# Altium PCB MiniBall.PcbDoc
Units mm, origin at the board's own origin, x right, y up, seen from the top; angles counter-clockwise.
Board outline 43 x 55 mm, 4 copper layers (Top Layer, Plane 1, Plane 2, Bottom Layer), stack 0.781 mm thick; 44 components, 24 nets, 153 pads, 113 vias.
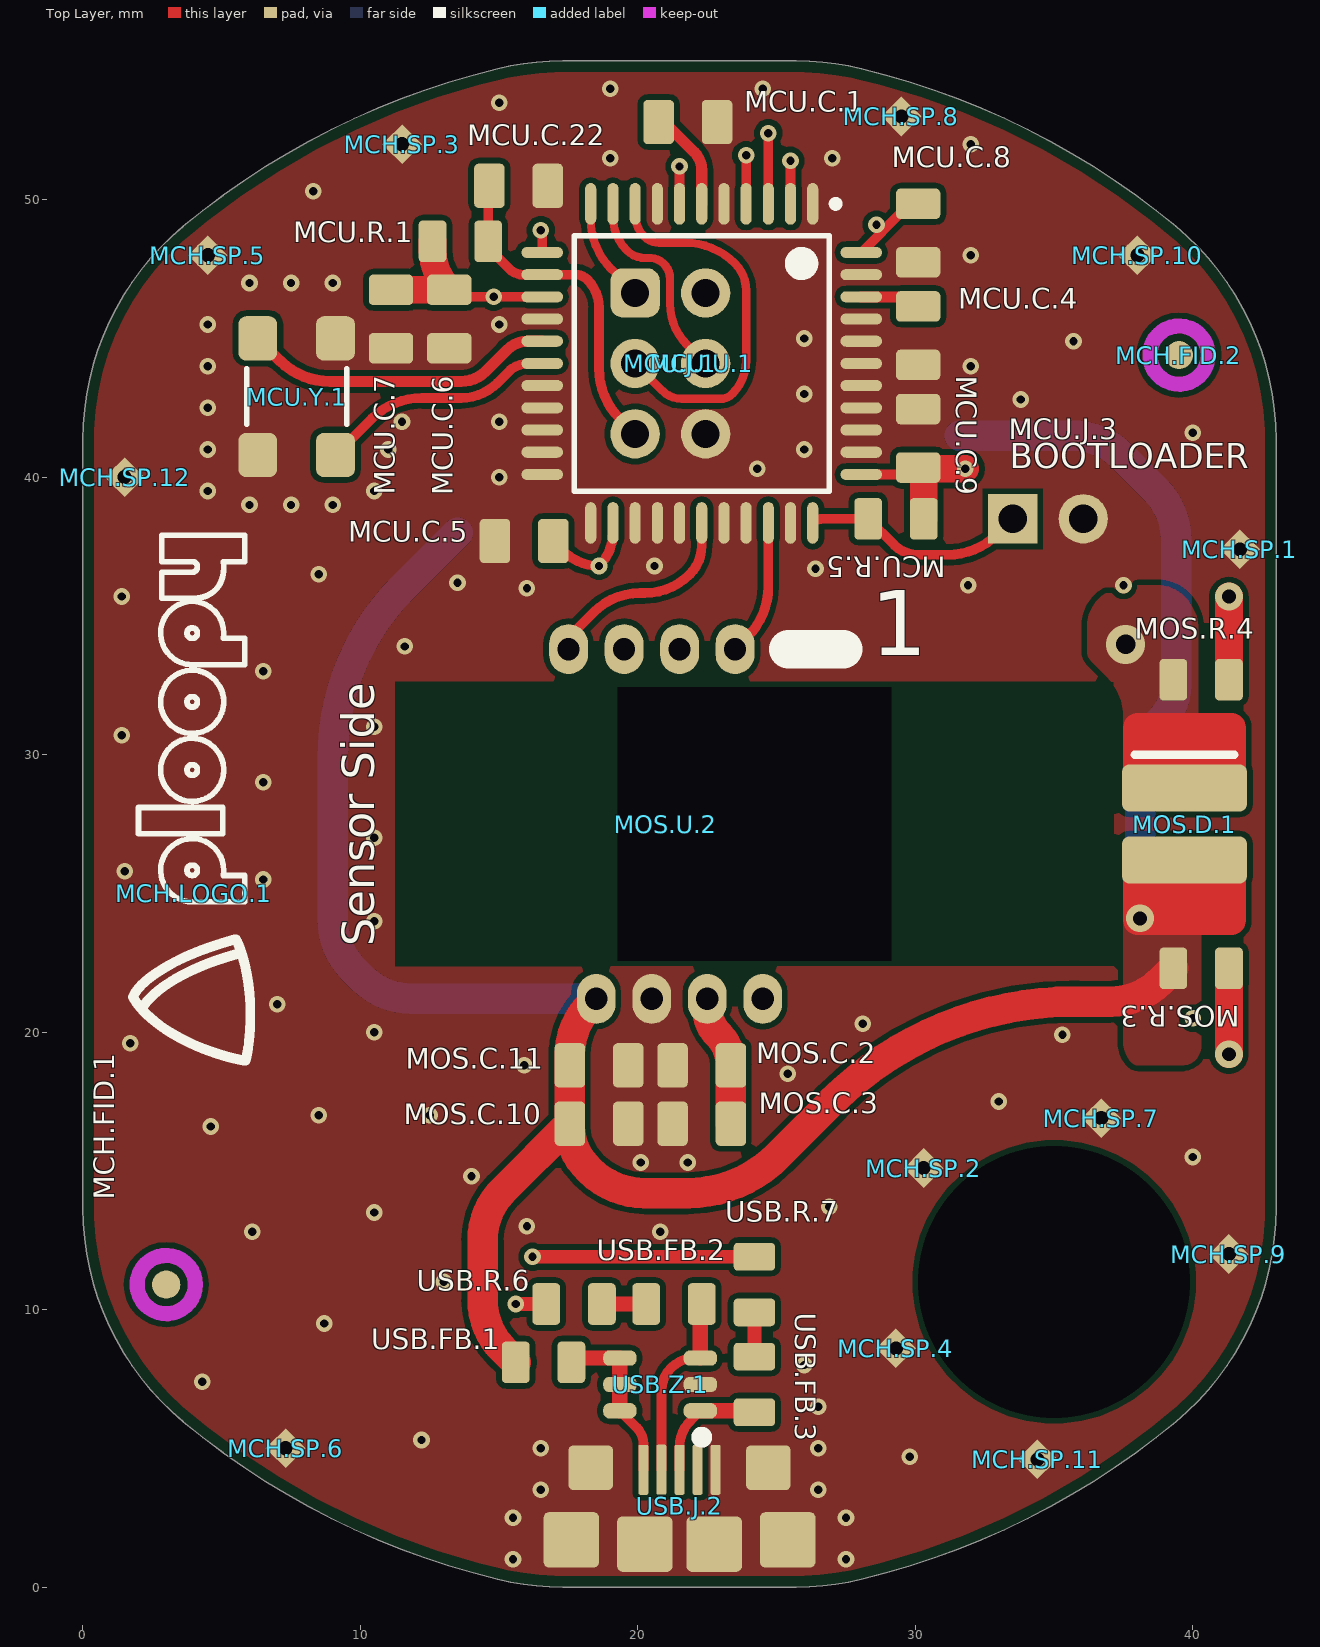
[diagram p0: Top Layer view]
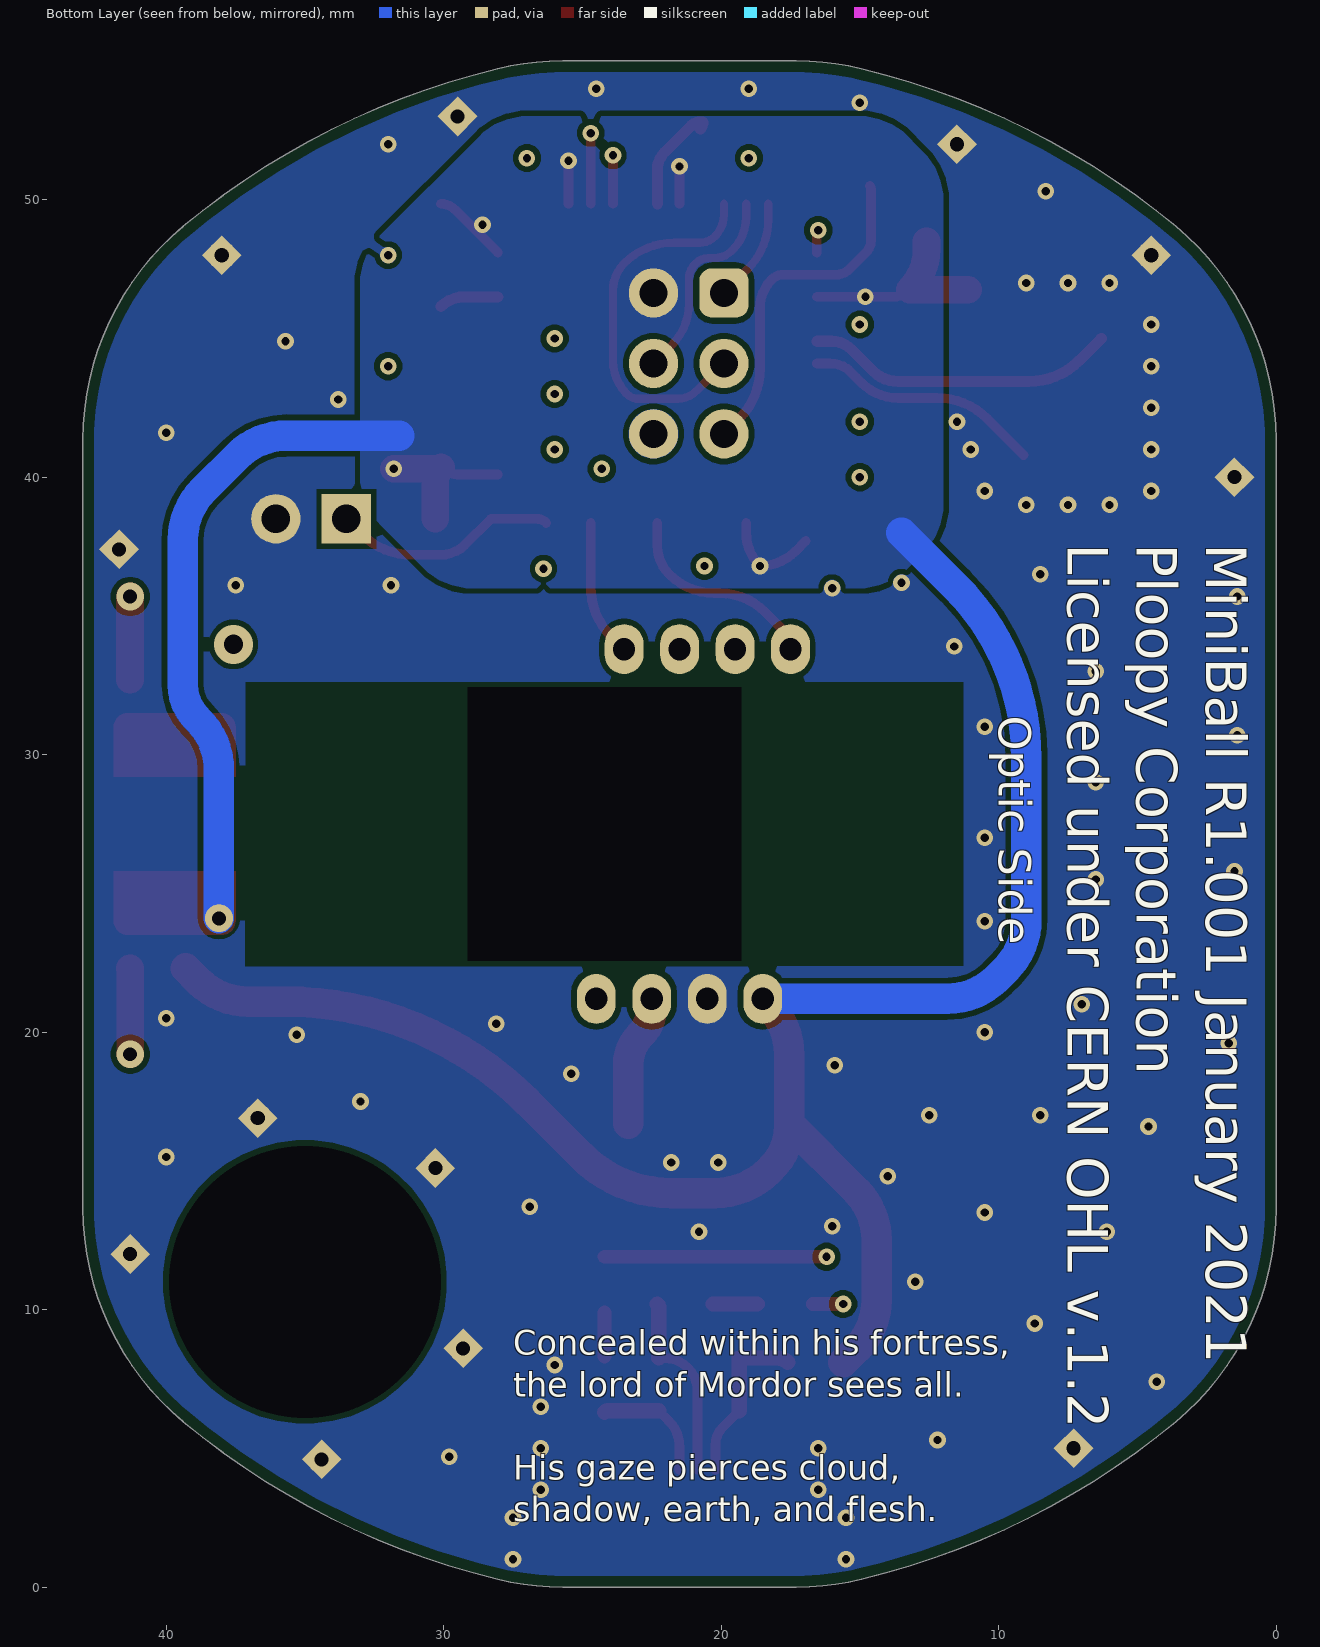
[diagram p1: Bottom Layer view, seen from below]
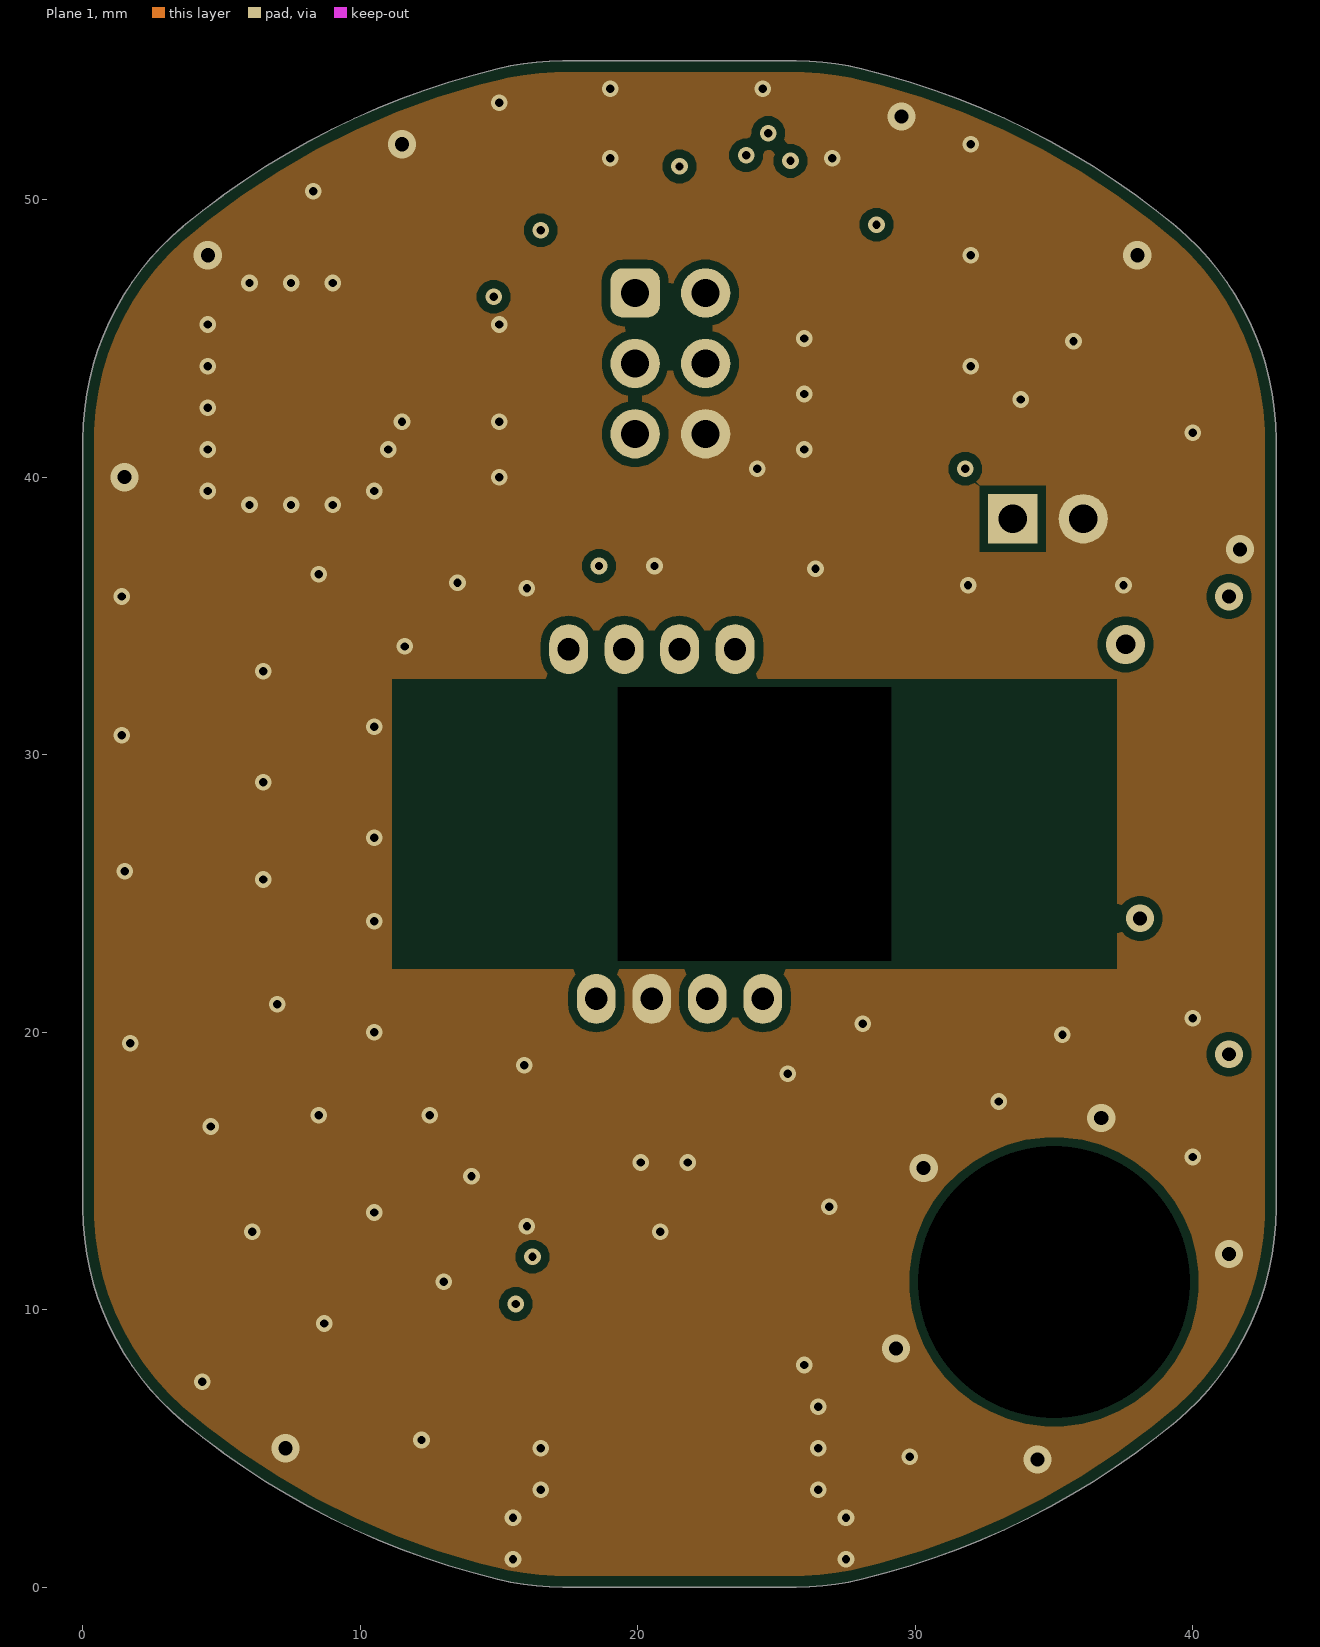
[diagram p2: Plane 1]
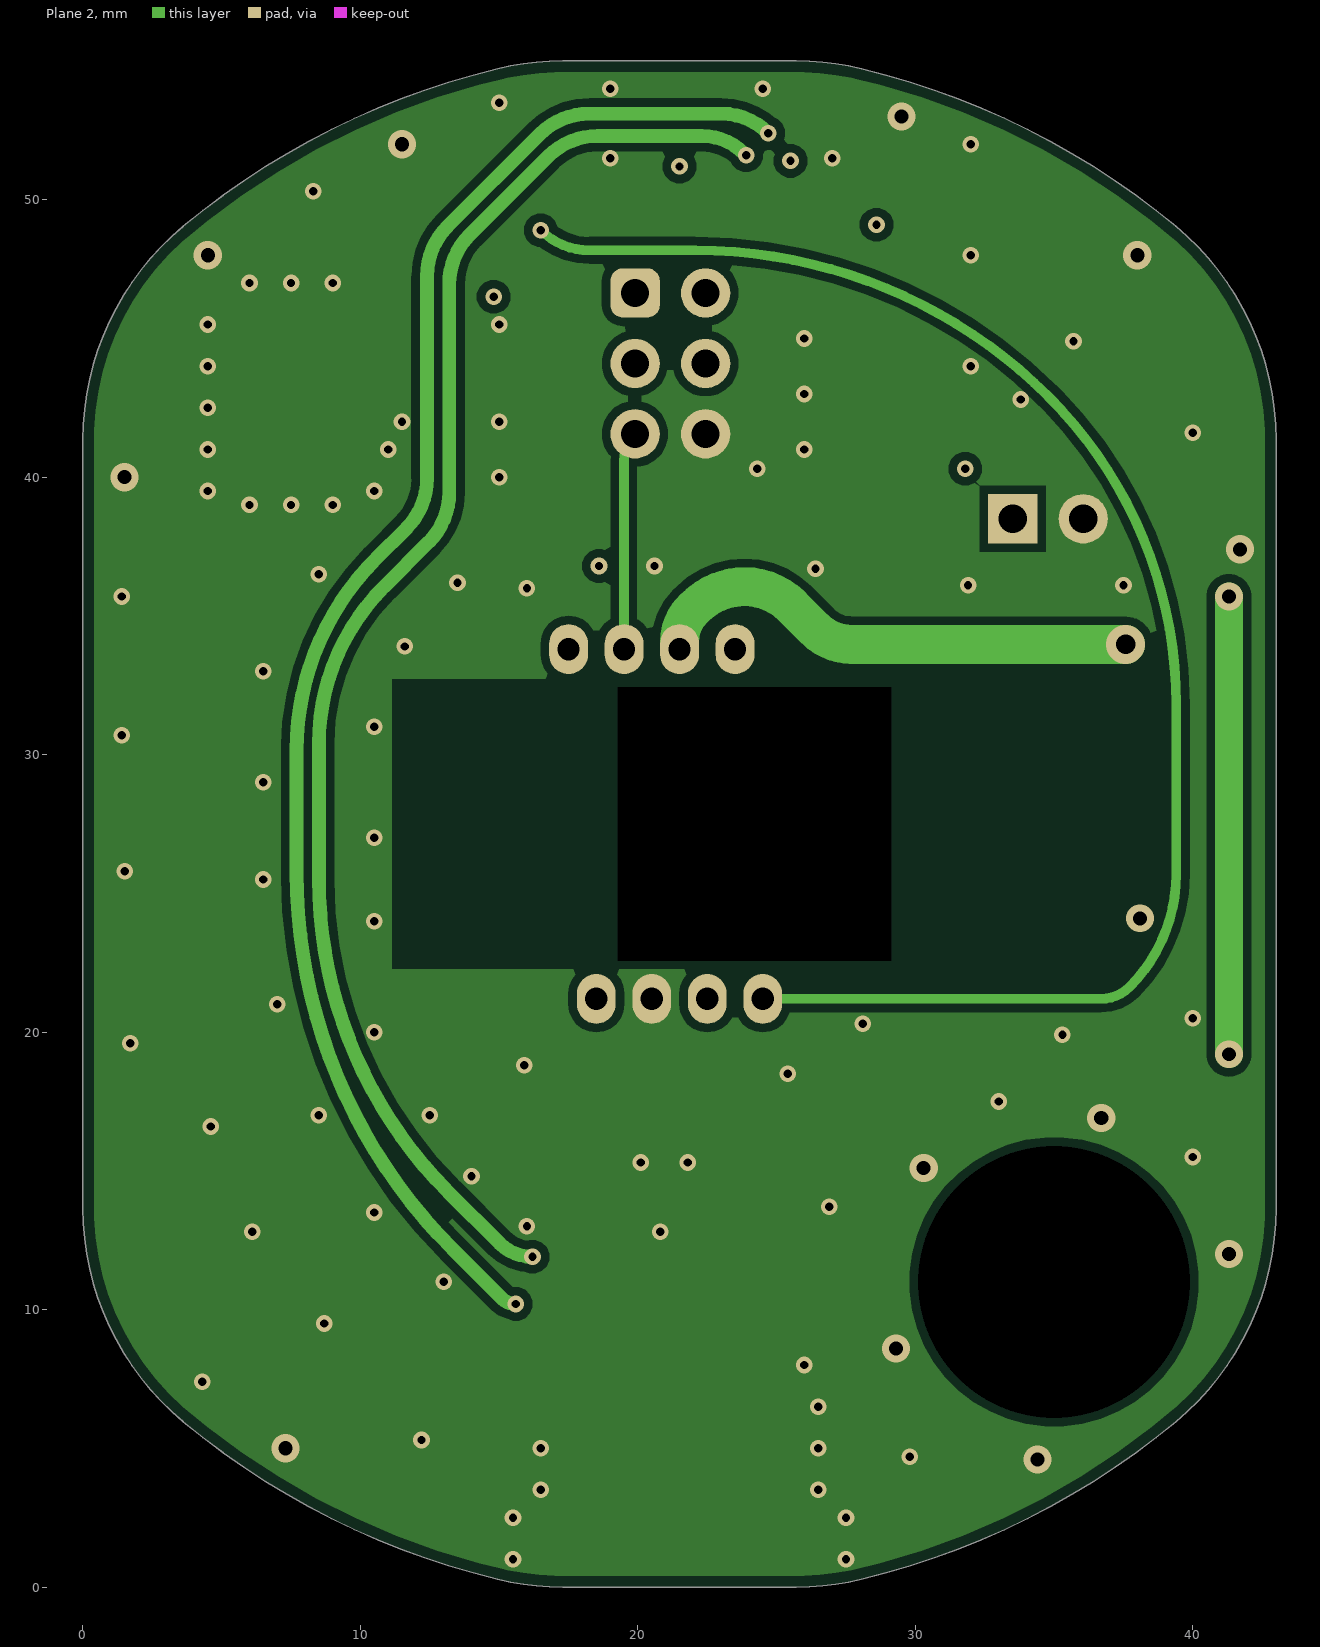
[diagram p3: Plane 2]

## Layer stack, top to bottom
Top Mask: solder mask 0.01, Solder Resist, Dk 3.5
Top Layer: signal copper 0.036
Dielectric 1: prepreg 0.127, FR-4, Dk 4.2
Plane 1: signal copper 0.036
Dielectric 4: core 0.383, Dk 4.2
Plane 2: signal copper 0.036
Dielectric 2: prepreg 0.127, Dk 4.2
Bottom Layer: signal copper 0.036
Bottom Solder: solder mask 0.01, Solder Resist, Dk 3.5

## Board outline
3.611,5.96 ccw(c21.5,27.5) 14.946,0.278 ccw(c17.287,10) 17.287,0 25.713,0 ccw(c25.713,10) 28.054,0.278 ccw(c21.5,27.5) 39.389,5.96 ccw(c33,13.653) 43,13.653 43,41.347 ccw(c33,41.347) 39.389,49.04 ccw(c21.5,27.5) 28.054,54.722 ccw(c25.713,45) 25.713,55 17.287,55 ccw(c17.287,45) 14.946,54.722 ccw(c21.5,27.5) 3.611,49.04 ccw(c10,41.347) 0,41.347 0,13.653 ccw(c10,13.653)

## Design rules (kind name [scope] priority, off if disabled: settings)
BoardOutlineClearance [(Not HasFootprint('SPARKGAP'))] p1: gap=0.4 ignorepadtopadclearanceinfootprint=FALSE except(0: Arc-SplitBarrior Arc-SplitContinuation Track-SplitBarrior Track-SplitContinuation SMDPad-SplitBarrior SMDPad-SplitContinuation THPad-SplitBarrior THPad-SplitContinuation Via-SplitBarrior Via-SplitContinuation Fill-SplitBarrior Fill-SplitContinuation Poly-SplitBarrior Poly-SplitContinuation Region-SplitBarrior Region-SplitContinuation Text-SplitBarrior Text-SplitContinuation)
Clearance "HighV Pads" [(InNetClass('HighV') AND (IsPad OR IsVia)) vs IsPad OR IsVia] p1: gap=0.4 ignorepadtopadclearanceinfootprint=FALSE except(0: Arc-Hole Track-Hole SMDPad-Hole THPad-Hole Via-Hole Fill-Hole Poly-Hole Region-Hole Text-Hole) // Establishes minimum clearance between bare pads that are high voltage, per IPC2221A Table 6-1, 51-100V, condition A6
Clearance Inter-Pad [IsPad vs IsPad] p2: gap=0.2 ignorepadtopadclearanceinfootprint=FALSE except(0: Arc-Hole Track-Hole SMDPad-Hole THPad-Hole Via-Hole Fill-Hole Poly-Hole Region-Hole Text-Hole)
Clearance "Spark Gaps" [InNetClass('Spark Gap') vs InNet('GND') And InPoly] p3: gap=0.635 ignorepadtopadclearanceinfootprint=FALSE except(0: Arc-Hole Track-Hole SMDPad-Hole THPad-Hole Via-Hole Fill-Hole Poly-Hole Region-Hole Text-Hole)
Clearance FIDs [Name like 'FID*'] p4: gap=1.016 ignorepadtopadclearanceinfootprint=FALSE except(0: Arc-Hole Track-Hole SMDPad-Hole THPad-Hole Via-Hole Fill-Hole Poly-Hole Region-Hole Text-Hole)
Clearance "Inner Planes" [InPoly AND OnMid] p5: gap=0.3 ignorepadtopadclearanceinfootprint=FALSE except(0: Arc-Hole Track-Hole SMDPad-Hole THPad-Hole Via-Hole Fill-Hole Poly-Hole Region-Hole Text-Hole) // Defines a larger clearance for planes on inner layers.
Clearance "All Planes" [InPoly] p6: gap=0.2 ignorepadtopadclearanceinfootprint=FALSE except(0: Arc-Hole Track-Hole SMDPad-Hole THPad-Hole Via-Hole Fill-Hole Poly-Hole Region-Hole Text-Hole) // Defines minimum clearance between planes on the same layer.
Clearance "Inner Layer Clearance" [OnMid vs OnMid] p7: gap=0.22 ignorepadtopadclearanceinfootprint=FALSE // We will give inner layers more spacing because they tend to be subject to stricter process limits.
Clearance [All] p8: gap=0.22 ignorepadtopadclearanceinfootprint=FALSE except(0: Arc-Hole Track-Hole SMDPad-Hole THPad-Hole Via-Hole Fill-Hole Poly-Hole Region-Hole Text-Hole) // 2 oz (70um) boards require at least 10mil spacing. We give a bit more to make sure things work well.
ComponentClearance "Terminal Block" [(HasFootprint('Phoenix 1933189 - Header')) vs (HasFootprint('Phoenix 1933189 - Header'))] p1: gap=-2.286 collisioncheckmode=3 verticalgap=0.254 showdistances=FALSE
ComponentClearance "FET/TP self Clearance" [(Name like 'Q*') Or (Name like 'TP*') vs (Name like 'Q*') Or (Name like 'TP*')] p2: gap=0.254 collisioncheckmode=3 verticalgap=0.254 showdistances=FALSE
ComponentClearance [Not ((Name like 'H*') Or (Name like 'FID*') Or (Name like 'SP*')) vs Not ((Name like 'H*') Or (Name like 'FID*') Or (Name like 'SP*'))] p3: gap=0.5 collisioncheckmode=3 verticalgap=0.5 showdistances=FALSE
DiffPairsRouting [All] p1: maxlimit=0.508 minlimit=0.279 mostfreqgap=0.381 substack1={769A8C6D-1C2C-4ABD-9F78-73D1337B8DA3} toplayer_{769a8c6d-1c2c-4abd-9f78-73d1337b8da3}_minwidth=0.381 toplayer_{769a8c6d-1c2c-4abd-9f78-73d1337b8da3}_maxwidth=0.381 toplayer_{769a8c6d-1c2c-4abd-9f78-73d1337b8da3}_prefwidth=0.381 midlayer2_{769a8c6d-1c2c-4abd-9f78-73d1337b8da3}_minwidth=0.381 midlayer2_{769a8c6d-1c2c-4abd-9f78-73d1337b8da3}_maxwidth=0.381 midlayer2_{769a8c6d-1c2c-4abd-9f78-73d1337b8da3}_prefwidth=0.381 midlayer3_{769a8c6d-1c2c-4abd-9f78-73d1337b8da3}_minwidth=0.381 midlayer3_{769a8c6d-1c2c-4abd-9f78-73d1337b8da3}_maxwidth=0.381 midlayer3_{769a8c6d-1c2c-4abd-9f78-73d1337b8da3}_prefwidth=0.381 bottomlayer_{769a8c6d-1c2c-4abd-9f78-73d1337b8da3}_minwidth=0.381 bottomlayer_{769a8c6d-1c2c-4abd-9f78-73d1337b8da3}_maxwidth=0.381 bottomlayer_{769a8c6d-1c2c-4abd-9f78-73d1337b8da3}_prefwidth=0.381 toplayer_prefgap=0.279 toplayer_minwidth=0.279 toplayer_maxwidth=0.508 toplayer_prefwidth=0.381 midlayer2_mingap=0.305 midlayer2_minwidth=0.305 midlayer2_maxwidth=0.508 midlayer2_prefwidth=0.381 midlayer3_prefgap=0.279 midlayer3_minwidth=0.279 midlayer3_maxwidth=0.508 midlayer3_prefwidth=0.381 bottomlayer_prefgap=0.279 bottomlayer_minwidth=0.279 bottomlayer_maxwidth=0.508 bottomlayer_prefwidth=0.381 maxuncoupledlength=12.7
Height [All] p1: minheight=0 maxheight=41 prefheight=12.7
HoleSize [All] p1: absolutevalues=TRUE maxlimit=100 minlimit=0.3 maxpercent=80.000 minpercent=20.000
HoleToHoleClearance [All] p1: gap=0.6 allowstackedmicrovias=TRUE
LayerPairs [All] p1: enforce=FALSE
MinimumSolderMaskSliver [All] p1: minsoldermaskwidth=0.09
NetAntennae [Not (HasFootprint('BALANCE_RESISTOR'))] p1: netantennaetolerance=0
PasteMaskExpansion [All] p1: expansion=-0.025
PlaneClearance [All] p1: clearance=0.3
PlaneConnect [All] p1: pad.planeconnectstyle=Relief pad.reliefexpansion=0.5 pad.reliefentries=4 pad.reliefconductorwidth=0.5 pad.reliefairgap=0.25 via.planeconnectstyle=Direct via.reliefexpansion=0.5 via.reliefentries=4 via.reliefconductorwidth=0.5 via.reliefairgap=0.25
PolygonConnect "PolygonConnect Spark Gap" [HasFootprint('SparkGap')] p1: connectstyle=Direct reliefconductorwidth=0.254 reliefentries=4 polygonreliefangle="90 Angle" airgapwidth=0.254 // This rule makes it so spark gaps get direct connections to ground planes.
PolygonConnect PolygonConnect_GND [All vs InNet('GND')] p2: connectstyle=Direct reliefconductorwidth=0.5 reliefentries=4 polygonreliefangle="90 Angle" airgapwidth=0.25 // This rule specifies all vias and holes connected to a GND plane have direct connections.
PolygonConnect [All] p3: connectstyle=Direct reliefconductorwidth=0.5 reliefentries=4 polygonreliefangle="90 Angle" airgapwidth=0.25
RoutingVias [All] p1: holewidth=0.5 width=1 viastyle="Through Hole" minholewidth=0.2 minwidth=0.5 maxholewidth=5.08 maxwidth=6.35
ShortCircuit [Not (InPadClass('TraceResistorPads')) vs Not (InPadClass('TraceResistorPads'))] p1: allowed=FALSE
SilkToBoardRegionClearance [All] p1 off:
SilkToSilkClearance [All] p1 off: silktosilkclearance=0.254
SilkToSolderMaskClearance SilkscreenOverComponentPads [IsPad] p1: minsilkscreentomaskgap=0.102 clearancetoexposedcopper=FALSE
SolderMaskExpansion [All] p1: expansion=0.076 istentingtop=FALSE
Width [All] p1: maxlimit=50.8 minlimit=0.26 preferedwidth=0.4 substack1={769A8C6D-1C2C-4ABD-9F78-73D1337B8DA3} midlayer2_minwidth=0.35 midlayer3_minwidth=0.35 minimp=50.000000 maximp=50.000000 favimp=50.000000
15 further rules are at their usual default settings.

## Classes and differential pairs
component class USB: USB.FB.1 USB.FB.2 USB.FB.3 USB.J.2 USB.R.6 USB.R.7 USB.Z.1
component class MOS: MOS.C.2 MOS.C.3 MOS.C.10 MOS.C.11 MOS.D.1 MOS.R.3 MOS.R.4 MOS.U.2
component class MCU: MCU.C.1 MCU.C.4 MCU.C.5 MCU.C.6 MCU.C.7 MCU.C.8 MCU.C.9 MCU.C.22 MCU.J.1 MCU.J.3 MCU.R.1 MCU.R.5 MCU.U.1 MCU.Y.1
component class MCH: MCH.FID.1 MCH.FID.2 MCH.LOGO.1 MCH.SP.1 MCH.SP.2 MCH.SP.3 MCH.SP.4 MCH.SP.5 MCH.SP.6 MCH.SP.7 MCH.SP.8 MCH.SP.9 MCH.SP.10 MCH.SP.11 MCH.SP.12

## Components (designator, comment, footprint, x,y, rotation, side; value= is the part's Value field where it differs from the comment)
MCH.FID.1 "IPC-7351 Fiducial 1mm" FIDUCIAL_1.5 3,10.9 r90 top (schematic designator FID1)
MCH.FID.2 "IPC-7351 Fiducial 1mm" FIDUCIAL_1.5 39.5,44.4 r90 top (schematic designator FID2)
MCH.LOGO.1 "Ploopy logo, silkscreen" PloopyLogo 4,25 r90 top (schematic designator LOGO1)
MCH.SP.1 "Spark Gap" SparkGap 41.7,37.4 r90 top (schematic designator SP1)
MCH.SP.2 "Spark Gap" SparkGap 30.3,15.1 r90 top (schematic designator SP2)
MCH.SP.3 "Spark Gap" SparkGap 11.5,52 r90 top (schematic designator SP3)
MCH.SP.4 "Spark Gap" SparkGap 29.3,8.6 r90 top (schematic designator SP4)
MCH.SP.5 "Spark Gap" SparkGap 4.5,48 r90 top (schematic designator SP5)
MCH.SP.6 "Spark Gap" SparkGap 7.3,5 r90 top (schematic designator SP6)
MCH.SP.7 "Spark Gap" SparkGap 36.7,16.9 r90 top (schematic designator SP7)
MCH.SP.8 "Spark Gap" SparkGap 29.5,53 r90 top (schematic designator SP8)
MCH.SP.9 "Spark Gap" SparkGap 41.3,12 r90 top (schematic designator SP9)
MCH.SP.10 "Spark Gap" SparkGap 38,48 r90 top (schematic designator SP10)
MCH.SP.11 "Spark Gap" SparkGap 34.4,4.6 r90 top (schematic designator SP11)
MCH.SP.12 "Spark Gap" SparkGap 1.5,40 r90 top (schematic designator SP12)
MCU.C.1 "0805" "0805 - TALL" 21.8,52.8 r270 top value="1uF 25V" (schematic designator C1)
MCU.C.4 "0805" "0805 - TALL" 30.1,45.1 r180 top value="0.1uF 100V" (schematic designator C4)
MCU.C.5 "0805" "0805 - TALL" 15.9,37.7 r90 top value="0.1uF 100V" (schematic designator C5)
MCU.C.6 "0805" "0805 - TALL" 13.2,45.7 r180 top value="0.1uF 100V" (schematic designator C6)
MCU.C.7 "0805" "0805 - TALL" 11.1,45.7 r180 top value="10uF 25V" (schematic designator C7)
MCU.C.8 "0805" "0805 - TALL" 30.1,48.8 r180 top value="0.1uF 100V" (schematic designator C8)
MCU.C.9 "0805" "0805 - TALL" 30.1,41.4 r0 top value="0.1uF 100V" (schematic designator C9)
MCU.C.22 "0805" "0805 - TALL" 15.7,50.5 r270 top value="0.1uF 100V" (schematic designator C22)
MCU.J.1 "Atmel_ICSP" 6x2 19.9,46.64 r0 top (schematic designator J1)
MCU.J.3 "HEADER2" 2x1 33.51,38.5 r90 top (schematic designator J3)
MCU.R.1 "0805" 0805 13.6,48.5 r270 top value="10k 1%" (schematic designator R1)
MCU.R.5 "0805" 0805 29.3,38.5 r90 top value="10k 1%" (schematic designator R5)
MCU.U.1 "ATMEGA32U4RC-AU" "ATmega32U4 - TQFP80P1200X1200X120-44N" 22.3,44.1 r270 top (schematic designator U1)
MCU.Y.1 "ECS-160-12-30B-AGM" LFXTAL055663BULK 7.7,42.9 r270 top (schematic designator Y1)
MOS.C.2 "0805" "0805 - TALL" 22.3,18.8 r90 top value="0.1uF 100V" (schematic designator C2)
MOS.C.3 "0805" "0805 - TALL" 22.3,16.7 r90 top value="1uF 25V" (schematic designator C3)
MOS.C.10 "0805" "0805 - TALL" 18.6,16.7 r270 top value="10uF 25V" (schematic designator C10)
MOS.C.11 "0805" "0805 - TALL" 18.6,18.8 r270 top value="0.1uF 100V" (schematic designator C11)
MOS.D.1 "SIDELED-A67F" SIDELED-A67F 39.4,27.5 r0 top (schematic designator D1)
MOS.R.3 "0805" 0805 40.3,22.3 r270 top value="22R 1%" (schematic designator R3)
MOS.R.4 "0805" 0805 40.3,32.7 r90 top value="22R 1%" (schematic designator R4)
MOS.U.2 "ADNS-5050" ADNS-5050 23.5,33.8 r0 top locked (schematic designator U2)
USB.FB.1 "ACML-0805-601-T" 0805 16.6,8.1 r270 top value="Ferrite Bead 600R" (schematic designator FB1)
USB.FB.2 "ACML-0805-601-T" 0805 21.3,10.2 r270 top value="Ferrite Bead 600R" (schematic designator FB2)
USB.FB.3 "ACML-0805-601-T" 0805 24.2,7.3 r180 top value="Ferrite Bead 600R" (schematic designator FB3)
USB.J.2 "10118192-0001LF" 10118192-0001LF 21.5,0.4 r180 top (schematic designator J2)
USB.R.6 "0805" 0805 17.7,10.2 r270 top value="22R 1%" (schematic designator R6)
USB.R.7 "0805" 0805 24.2,10.9 r180 top value="22R 1%" (schematic designator R7)
USB.Z.1 "IP4220CZ6,125" "PESD3V3S4UD - SOT95P275X110-6N" 20.8,7.3 r180 top (schematic designator Z1)

## Footprints (in the part's own frame and the unit in brackets; to place one, negate y for a bottom-side part, rotate by r counter-clockwise, add the part's x,y. Pads: shape width x height; smd on the part's side, far side on the other; paste and mask are expansions set on the pad)
2x1 [mil]
  rect 70x70 hole 40 paste-3897.64: 1(0,0)
  round 70 hole 40 paste-3897.64: 2(0,-100)
  body extent -50,-150 50,50, height 339
6x2 [mil]
  rrect50% 70x70 hole 40 paste-3897.64: 1(0,0)
  round 70 hole 40 paste-3897.64: 2(100,0) 3(0,-100) 4(100,-100) 5(0,-200) 6(100,-200)
  body extent -50,-250 150,50, height 330
0805 [mm] "Chip Capacitor, 2-Leads, Body 2.0x1.3mm, IPC Medium Density"
  rrect30% 1.5x1 smd paste-0.04: 1(0,1.002) 2(0,-1.002)
  body extent -0.72,-1.1 0.72,1.1, height 0.8
"0805 - TALL" [mm] "Same as 0805 footprint, but solder mask is adjusted to leave more paste behind for tall (>0.9mm) components like big caps, which tend to be solder-starved on the regular footprint."
  rrect30% 1.6x1.1 smd paste-0.04: 1(0,1.052) 2(0,-1.052)
  body extent -0.72,-1.1 0.72,1.1, height 0.8
10118192-0001LF [mm]
  rrect30% 0.35x1.8 smd paste-0.04 mask+0.07: 1(1.3,-3.825) 2(0.65,-3.828) 3(0,-3.825) 4(-0.65,-3.825) 5(-1.3,-3.825)
  rrect20% 2x2 smd paste-0.3: 6(-3.9,-1.3) 6(-1.25,-1.147) 6(1.25,-1.147) 6(3.9,-1.3)
  rrect20% 1.6x1.6 smd paste-0.3: 6(-3.2,-3.9) 6(3.2,-3.9)
  body extent -3.96,-4.36 3.96,1.3, height 2.79
ADNS-5050 [mm]
  oval 1.4x1.8 hole 0.8: 1(0,0) 2(-2,0) 3(-4,0) 4(-6,0) 5(-5,-12.6) 6(-3,-12.6) 7(-1,-12.6) 8(1,-12.6)
  rect 0x0 hole 9.85 square unplated: ""(0.7,-6.3)
  silkscreen extent 1.92,0 3.9,0, body extent -15,-14.3 15,1.7, height 5.45
"ATmega32U4 - TQFP80P1200X1200X120-44N" [mm] "TQFP, 44-Leads, Body 10.00x10.00mm, Pitch 0.80mm, IPC Medium Density"
  rrect100% 1.5x0.4 smd paste-0.06: 1(-5.75,4) 2(-5.75,3.2) 3(-5.75,2.4) 4(-5.75,1.6) 5(-5.75,0.8) 6(-5.75,0) 7(-5.75,-0.8) 8(-5.75,-1.6) 9(-5.75,-2.4) 10(-5.75,-3.2) 11(-5.75,-4) 23(5.75,-4) 24(5.75,-3.2) 25(5.75,-2.4) 26(5.75,-1.6) 27(5.75,-0.8) 28(5.75,0) 29(5.75,0.8) 30(5.75,1.6) 31(5.75,2.4) 32(5.75,3.2) 33(5.75,4)
  rrect100% 0.4x1.5 smd paste-0.06: 12(-4,-5.75) 13(-3.2,-5.75) 14(-2.4,-5.75) 15(-1.6,-5.75) 16(-0.8,-5.75) 17(0,-5.75) 18(0.8,-5.75) 19(1.6,-5.75) 20(2.4,-5.75) 21(3.2,-5.75) 22(4,-5.75) 34(4,5.75) 35(3.2,5.75) 36(2.4,5.75) 37(1.6,5.75) 38(0.8,5.75) 39(0,5.75) 40(-0.8,5.75) 41(-1.6,5.75) 42(-2.4,5.75) 43(-3.2,5.75) 44(-4,5.75)
  silkscreen extent -5.87,-4.6 4.6,4.95, body extent -5,-5 5,5, height 1.2
FIDUCIAL_1.5 [mil]
  round 40 smd paste-60 mask+30: 1(0,0)
  Top Layer keep-out circle w21.65: c0,0 r41.34
LFXTAL055663BULK [mm]
  rrect40% 1.6x1.4 smd paste-0.05: 1(-2.1,-1.4) 2(2.1,-1.4) 3(2.1,1.4) 4(-2.1,1.4)
  silkscreen extent -1,-1.8 1,1.8, body extent -2.5,-1.6 2.5,1.6, height 1
"PESD3V3S4UD - SOT95P275X110-6N" [mm] "SOT23, 6-Leads, Body 2.90x2.75mm, Pitch 0.95mm, IPC Medium Density"
  rrect80% 1.2x0.55 smd paste-0.045 mask+0.085: 1(-1.45,0.95) 2(-1.45,0) 3(-1.45,-0.95) 4(1.45,-0.95) 5(1.45,0) 6(1.45,0.95)
  silkscreen extent -1.63,1.78 -1.38,2.02, body extent -0.85,-1.55 0.85,1.55, height 1.1
PloopyLogo [mm]
  silkscreen extent -6.04,-2.03 12.9,2.2
SIDELED-A67F [mm]
  rrect30% 4.5x1.7 smd paste-0.04: A(0.3,-1.3) C(0.3,1.3)
  Top Layer region: 2.5,-1.7 2.5,-3.5 2.462,-3.691 2.354,-3.854 2.191,-3.962 2,-4 2,-4 -1.4,-4 -1.591,-3.962 -1.754,-3.854 -1.862,-3.691 -1.9,-3.5 -1.9,-3.5 -1.9,-1.7
  Top Layer region: -1.9,1.7 -1.9,3.5 -1.862,3.691 -1.754,3.854 -1.591,3.962 -1.4,4 -1.4,4 2,4 2.191,3.962 2.354,3.854 2.462,3.691 2.5,3.5 2.5,3.5 2.5,1.7
  silkscreen extent -1.5,2.5 2.1,2.5, body extent -1.56,-2 2.2,2, height 4.03
SparkGap [mil]
  rect 40x40 smd rot 45 paste-99 mask+4: 1(0,0)
  rect 40x40 smd far side rot 45 paste-99 mask+4: 1(0,0)

## Part data
MCH.FID.1 MCH.FID.2: library part FIDUCIAL_1.5, PNP-A=1, PNP-da=0, PNP-dx=0, PNP-dy=0, PNP-FeedType=Fiducial, PNP-Level=1, PNP-Lv=1, PNP-Nzl=2, PNP-PlacePriority=0, PNP-Pt=0, PNP-TapeIndex=0, PNP-TapeWidth=0, PNP-Thk=1.02, PNP-TS=70, PNP-Type=MARK1, PNP-Voff=0, PNP-W=0, PNP-X=4, PNP-Y=4
MCH.LOGO.1: library part PloopyLogo, PNP-A=0, PNP-da=0, PNP-dx=0, PNP-dy=0, PNP-FeedType=Tape, PNP-Level=1, PNP-Lv=1, PNP-Nzl=2, PNP-PlacePriority=1, PNP-Pt=0, PNP-TapeIndex=1, PNP-TapeWidth=8, PNP-Thk=1, PNP-TS=70, PNP-Type=CHI, PNP-Voff=0, PNP-W=0, PNP-X=1, PNP-Y=1
MCH.SP.1 MCH.SP.2 MCH.SP.3 MCH.SP.4 MCH.SP.5 MCH.SP.6 MCH.SP.7 MCH.SP.8 MCH.SP.9 MCH.SP.10 MCH.SP.11 MCH.SP.12: "Open square pad for spark gapping", PNP-A=0, PNP-da=0, PNP-dx=0, PNP-dy=0, PNP-FeedType=Tape, PNP-Level=1, PNP-Lv=1, PNP-Nzl=2, PNP-PlacePriority=1, PNP-Pt=0, PNP-TapeIndex=1, PNP-TapeWidth=8, PNP-Thk=1, PNP-TS=70, PNP-Type=CHI, PNP-Voff=0, PNP-W=0, PNP-X=1, PNP-Y=1
MCU.C.1 MOS.C.3: library part "Cap 1uF 25V", "0805, X5R or better", Supplier Part Number 1=1276-1066-2-ND, Supplier 1=Digi-Key, Supplier 2=Digi-Key, Supplier Part Number 2=1276-1066-1-ND
MCU.C.4 MCU.C.5 MCU.C.6 MCU.C.8 MCU.C.9 MCU.C.22 MOS.C.2 MOS.C.11: library part "Cap 0.1uF 100V", "0805, X5R or better", Supplier Part Number 1=1276-6840-2-ND, Supplier 1=Digi-Key
MCU.C.7 MOS.C.10: library part "Cap 10uF 25V", "0805, X5R or better", Supplier Part Number 1=81-GRM21BR61E106KA3L, Supplier 1=Mouser, Supplier 2=Digi-Key, Supplier Part Number 2=490-5523-1-ND
MCU.J.1: "6-pin 0.100\" ICSP header", Supplier Part Number 1=S2012EC-03-ND, Supplier 1=Digi-Key
MCU.J.3: "2-pin 0.100\" header", Supplier Part Number 1=855-M20-9990245, Supplier 1=Mouser, Supplier 2=Digi-Key, Supplier Part Number 2=952-2261-ND
MCU.R.1 MCU.R.5: library part "Res 10k 1% 0805", "Chip resistor", Supplier Part Number 1=RMCF0805FT10K0TR-ND, Supplier 1=Digi-Key
MCU.U.1: "IC MCU 8BIT 32KB FLASH 44TQFP", Supplier Part Number 1=ATMEGA32U4RC-AU-ND, PNP-A=270, PNP-da=0, PNP-dx=0, PNP-dy=0, PNP-FeedType=Tray, PNP-Level=1.2, PNP-Lv=126, PNP-Nzl=6, PNP-PlacePriority=3, PNP-Pt=1, PNP-Thk=1.6, PNP-TS=70, PNP-Type=QFP, PNP-Voff=0, PNP-W=0.1, PNP-X=12, PNP-Y=12, Supplier 1=Digi-Key, Supplier 2=Mouser, Supplier 3=Arrow, Supplier Part Number 2=556-ATMEGA32U4RC-AU, Supplier Part Number 3=ATMEGA32U4RC-AU
MCU.Y.1: "16MHz Crystal 12pF 100 Ohms 4-SMD, No Lead", Supplier Part Number 1=XC2686CT-ND, Supplier 1=Digi-Key, Supplier 2=Mouser, Supplier Part Number 2=520-160-12-30B-AGMT
MOS.D.1: "Red/Orange/Yellow Side-facing SMT LEDs, high brightness (~2lm)", Supplier Part Number 1=475-3392-1-ND, Supplier 1=Digi-Key, Supplier 2=Digi-Key, Supplier Part Number 2=475-3415-6-ND
MOS.R.3 MOS.R.4 USB.R.6 USB.R.7: library part "Res 22R 1% 0805", "Chip resistor", Supplier Part Number 1=RMCF0805FT22R0CT-ND, Supplier 1=Digi-Key, Supplier 2=Arrow, Supplier Part Number 2=RMCF0805FT22R0
MOS.U.2: "Optical Mouse Navigation Sensor"
USB.FB.1 USB.FB.2 USB.FB.3: "FERRITE BEAD 600 OHM 0805 1LN", Supplier Part Number 1=535-12556-1-ND, Supplier 1=Digi-Key
USB.J.2: "CONN RCPT USB2.0 MICRO B SMD R/A"
USB.Z.1: "TVS DIODE 5.5V 6TSOP (Low capacitance, USB)", Supplier Part Number 1=1727-3578-1-ND, Supplier 1=Digi-Key, Supplier 2=Mouser, Supplier 3=Arrow, Supplier Part Number 2=771-IP4220CZ6-T/R, Supplier Part Number 3=IP4220CZ6,125

## Free pads (board coordinates)
  round 0 hole 9.8: ""(35,11)

## Via types
v1: diameter 0.6, hole 0.3, Top Layer to Bottom Layer, tented both sides, 97 vias
v2: diameter 1.016, hole 0.508, Top Layer to Bottom Layer, tented both sides, 12 vias
v3: diameter 1, hole 0.5, Top Layer to Bottom Layer, tented both sides, 3 vias
v4: diameter 1.4, hole 0.7, Top Layer to Bottom Layer, tented both sides, 1 vias

## Nets (pads, with @x,y where several pads share a name; then routed paths per layer and width w, separated by ;. In a path a pad name is that pad's centre, name@x,y a point inside that pad or via, vN(x,y) a via of type N, cw(c..) or ccw(c..) an arc to the next point about the centre after c; other vN are vias at no path point)
GND: MCH.SP.1.1 MCH.SP.2.1 MCH.SP.3.1 MCH.SP.4.1 MCH.SP.5.1 MCH.SP.6.1 MCH.SP.7.1 MCH.SP.8.1 MCH.SP.9.1 MCH.SP.10.1 MCH.SP.11.1 MCH.SP.12.1 MCU.C.1.1 MCU.C.4.1 MCU.C.5.1 MCU.C.6.1 MCU.C.7.1 MCU.C.8.1 MCU.C.9.1 MCU.C.22.1 MCU.J.1.6 MCU.J.3.2 MCU.U.1.1 MCU.U.1.5 MCU.U.1.8 MCU.U.1.15 MCU.U.1.18 MCU.U.1.19 MCU.U.1.20 MCU.U.1.21 MCU.U.1.22 MCU.U.1.23 MCU.U.1.25 MCU.U.1.26 MCU.U.1.27 MCU.U.1.29 MCU.U.1.30 MCU.U.1.32 MCU.U.1.35 MCU.U.1.36 MCU.U.1.37 MCU.U.1.38 MCU.U.1.39 MCU.U.1.40 MCU.U.1.41 MCU.U.1.43 MCU.Y.1.2 MCU.Y.1.4 MOS.C.2.1 MOS.C.3.1 MOS.C.10.1 MOS.C.11.1 MOS.U.2.6 USB.J.2.5 USB.J.2.6 USB.Z.1.2
  other v1: 15.5,1 27.5,1 15.5,2.5 27.5,2.5 16.5,3.5 26.5,3.5 29.8,4.7 16.5,5 26.5,5 12.2,5.3 26.5,6.5 4.3,7.4 26,8 8.7,9.5 13,11 6.1,12.8 20.8,12.8 16,13 10.5,13.5 26.9,13.7 14,14.8 20.1,15.3 21.8,15.3 40,15.5 4.6,16.6 8.5,17 12.5,17 33,17.5 25.4,18.5 15.9,18.8 1.7,19.6 35.3,19.9 10.5,20 28.1,20.3 40,20.5 7,21 10.5,24 6.5,25.5 1.5,25.8 10.5,27 6.5,29 1.4,30.7 10.5,31 6.5,33 11.6,33.9 1.4,35.7 16,36 31.9,36.1 37.5,36.1 13.5,36.2 8.5,36.5 26.4,36.7 20.6,36.8 6,39 7.5,39 9,39 4.5,39.5 10.5,39.5 15,40 24.3,40.3 4.5,41 11,41 26,41 40,41.6 11.5,42 15,42 4.5,42.5 33.8,42.8 26,43 4.5,44 32,44 35.7,44.9 26,45 4.5,45.5 15,45.5 6,47 7.5,47 9,47 32,48 8.3,50.3 19,51.5 27,51.5 32,52 15,53.5 19,54 24.5,54
  other v2: 34.4,4.6 7.3,5 29.3,8.6 41.3,12 30.3,15.1 36.7,16.9 41.7,37.4 1.5,40 4.5,48 38,48 11.5,52 29.5,53
MISO: MCU.J.1.1 MCU.U.1.11 | length 3.8
  Top Layer w0.3: MCU.U.1.11 18.3,49.292 ccw(c20.84,49.292) 19.044,47.496 MCU.J.1.1
MOSI: MCU.J.1.4 MCU.U.1.10 | length 7.4
  Top Layer w0.3: MCU.U.1.10 19.1,49.382 ccw(c20.807,49.382) 19.6,48.175 ccw(c20.264,48.839) 20.264,47.9 20.464,47.9 20.48,47.9 cw(c20.407,47.152) 21.159,47.152 21.159,46.25 ccw(c23.257,46.25) 21.773,44.767 MCU.J.1.4
NetMCU.C.1_2: MCU.C.1.2 MCU.U.1.6 | length 3.9
  Top Layer w0.4: MCU.C.1.2@20.648,52.8 ccw(c21.004,52.8) MCU.C.1.2@20.752,52.548 ; MCU.C.1.2 cw(c20.748,52.311) 21.093,52.657 22.025,51.725 cw(c21.361,51.061) 22.3,51.061 MCU.U.1.6
NetMCU.C.4_2: MCU.C.4.2 MCU.U.1.42 | length 2.1
  Top Layer w0.4: MCU.U.1.42 29.261,46.5 cw(c29.261,45.313) MCU.C.4.2
NetMCU.J.3_1: MCU.J.3.1 MCU.R.5.1 MCU.U.1.33 | length 8.2
  Top Layer w0.35: MCU.U.1.33 cw(c26.662,37.988) 26.662,38.5 MCU.R.5.1 29.242,37.555 ccw(c30.1,38.413) 30.1,37.2 31.158,37.2 ccw(c31.158,39.74) 32.954,37.944 MCU.J.3.1
NetMCU.U.1_3: MCU.U.1.3 USB.R.6.2 | length 60
  Top Layer w0.35: MCU.U.1.3 v1(24.7,52.4)
  Top Layer w0.5: v1(15.6,10.2) USB.R.6.2
  Plane 2 w0.5: 13.331,12.169 15.122,10.378 ccw(c15.552,10.809) 15.552,10.2 v1(15.6,10.2) ; 13.33,12.17 cw(c26.917,25.76) 7.7,25.76 7.7,25.762 7.7,30.152 7.7,30.154 cw(c17.467,30.154) 10.562,37.062 11.656,38.156 ccw(c9.86,39.952) 12.4,39.952 12.4,47.248 cw(c14.94,47.248) 13.144,49.044 16.456,52.356 cw(c18.252,50.56) 18.252,53.1 23.01,53.1 cw(c23.01,50.71) v1(24.7,52.4)
NetMCU.U.1_4: MCU.U.1.4 USB.R.7.2 | length 62.6
  Top Layer w0.35: MCU.U.1.4 v1(23.9,51.6)
  Top Layer w0.5: v1(16.2,11.9) 16.201,11.901 24.199,11.901 USB.R.7.2
  Plane 2 w0.5: v1(16.2,11.9) cw(c16.2,13.59) 15.005,12.395 13.194,14.206 cw(c24.52,25.536) 8.5,25.536 8.5,25.538 8.5,30.376 8.5,30.379 cw(c16.518,30.379) 10.85,36.05 12.456,37.656 ccw(c10.66,39.452) 13.2,39.452 13.2,46.948 cw(c15.74,46.948) 13.944,48.744 16.756,51.556 cw(c18.552,49.76) 18.552,52.3 22.3,52.3 cw(c22.3,50.127) 23.836,51.664 v1(23.9,51.6)
NetMCU.U.1_12: MCU.U.1.12 MOS.U.2.8 | length 57
  Top Layer w0.35: v1(16.5,48.9) cw(c16.379,48.779) 16.55,48.779 MCU.U.1.12
  Plane 2 w0.35: v1(16.5,48.9) ccw(c18.25,50.65) 18.25,48.175 22.073,48.175 22.075,48.175 cw(c22.075,30.189) 34.793,42.907 34.795,42.905 34.806,42.894 ; MOS.U.2.8 36.693,21.2 ccw(c36.693,22.646) 37.714,21.622 ccw(c33.649,25.69) 39.4,25.69 39.4,31.804 39.4,31.806 ccw(c23.722,31.806) 34.807,42.893
NetMCU.U.1_16: MCU.U.1.16 MCU.Y.1.1 | length 11.3
  Top Layer w0.4: MCU.Y.1.1 7.106,44.194 ccw(c8.902,45.99) 8.902,43.45 13.625,43.45 ccw(c13.625,44.717) 14.521,43.821 15.3,44.6 cw(c16.024,43.876) 16.024,44.9 MCU.U.1.16
NetMCU.U.1_17: MCU.U.1.17 MCU.Y.1.3 | length 8.6
  Top Layer w0.35: MCU.Y.1.3 10.411,42.111 cw(c12.207,40.315) 12.207,42.855 13.625,42.855 ccw(c13.625,44.717) 14.943,43.402 15.117,43.576 15.403,43.862 cw(c15.649,43.613) 15.448,43.899 cw(c16.085,42.99) 16.085,44.1 MCU.U.1.17
NetMCU.U.1_28: MCU.U.1.28 MOS.U.2.4 | length 7.5
  Top Layer w0.35: MOS.U.2.4 cw(c18.526,33.8) 17.801,34.526 18.411,35.136 cw(c20.075,33.471) 20.075,35.825 20.245,35.825 ccw(c20.245,38.13) 21.875,36.5 ccw(c20.849,37.526) 22.3,37.526 MCU.U.1.28
NetMCU.U.1_31: MCU.U.1.31 MOS.U.2.1 | length 4.9
  Top Layer w0.35: MOS.U.2.1 23.956,34.256 ccw(c22.16,36.052) 24.7,36.052 MCU.U.1.31
NetMOS.C.2_2: MOS.C.2.2 MOS.C.3.2 MOS.U.2.7 | length 4.7
  Top Layer w1.1: MOS.U.2.7 22.5,20.866 ccw(c23.866,20.866) 22.9,19.9 cw(c21.808,18.808) 23.352,18.808 MOS.C.2.2 MOS.C.3.2
NetMOS.D.1_C: MOS.D.1.C MOS.R.4.1 MOS.U.2.2 | length 18.1
  Plane 2 w1.4: MOS.U.2.2 21.5,34.078 cw(c23.122,34.078) 21.975,35.225 22.058,35.308 cw(c23.854,33.512) 23.854,36.052 cw(c23.854,33.653) 25.551,35.349 26.375,34.525 ccw(c27.703,35.853) 27.703,33.975 v4(37.575,33.975)
NetMOS.R.3_1: MOS.R.3.1 MOS.R.4.2 | length 22.6
  Top Layer w1: v3(41.3,19.2) 41.3,22.298 MOS.R.3.1 ; v3(41.3,35.7) 41.302,35.698 MOS.R.4.2
  Plane 2 w1: v3(41.3,19.2) v3(41.3,35.7)
NetUSB.FB.1_1: USB.FB.1.1 USB.J.2.1 USB.Z.1.4 USB.Z.1.5 USB.Z.1.6 | length 6.1
  Top Layer w0.35: USB.Z.1.6 19.95,5.75 ; 19.95,5.75 cw(c19.346,5.146) 20.2,5.146 USB.J.2.1
  Top Layer w0.55: USB.FB.1.1 cw(c17.965,7.738) 17.965,8.25 USB.Z.1.4 USB.Z.1.5 USB.Z.1.6
NetUSB.FB.2_1: USB.FB.2.1 USB.J.2.2 USB.Z.1.3 | length 6.9
  Top Layer w0.35: USB.J.2.2 20.85,7.055 cw(c22.045,7.055) 21.2,7.9 cw(c22.045,7.055) 22.045,8.25 USB.Z.1.3
  Top Layer w0.55: USB.Z.1.3 22.25,10.073 cw(c22.429,10.073) USB.FB.2.1
NetUSB.FB.2_2: USB.FB.2.2 USB.R.6.1 | length 1.6
  Top Layer w0.55: USB.R.6.1 USB.FB.2.2
NetUSB.FB.3_1: USB.FB.3.1 USB.J.2.3 USB.Z.1.1 | length 4.3
  Top Layer w0.35: USB.J.2.3 21.5,5.034 cw(c22.866,5.034) 21.9,6 USB.Z.1.1
  Top Layer w0.55: USB.Z.1.1 24.073,6.35 cw(c24.073,6.171) USB.FB.3.1
NetUSB.FB.3_2: USB.FB.3.2 USB.R.7.1 | length 1.6
  Top Layer w0.5: USB.FB.3.2 USB.R.7.1
R\E\S\E\T\: MCU.C.22.2 MCU.J.1.5 MCU.R.1.1 MCU.U.1.13 MOS.U.2.3 | length 20.2
  Top Layer w0.35: MCU.C.22.2 ccw(c14.757,50.391) 14.602,50.391 MCU.R.1.1 ccw(c15.151,48.5) 14.763,48.112 15.375,47.5 ccw(c15.858,47.983) 15.858,47.3 MCU.U.1.13 17.753,47.3 cw(c17.753,46.703) 18.175,47.125 cw(c17.149,46.099) 18.6,46.099 18.6,43.912 ccw(c21.14,43.912) 19.344,42.116 MCU.J.1.5
  Plane 2 w0.35: MOS.U.2.3 19.5,40.594 cw(c20.866,40.594) MCU.J.1.5
SCLK: MCU.J.1.3 MCU.U.1.9 | length 13.8
  Top Layer w0.3: MCU.J.1.3 20.892,43.108 ; MCU.U.1.9 19.9,49.46 ccw(c21.01,49.46) 20.225,48.675 ccw(c20.768,49.218) 20.768,48.45 21.698,48.45 cw(c21.698,45.91) 23.494,47.706 ; 20.892,43.108 ccw(c21.575,43.791) 21.575,42.825 22.978,42.825 ccw(c22.978,43.422) 23.4,43 ccw(c22.193,44.207) 23.9,44.207 23.9,46.734 ccw(c22.534,46.734) 23.5,47.7 ; 23.494,47.706 cw(c22.293,46.493) 23.5,47.7 ; 23.494,47.706 23.5,47.7
V_USB: MCU.C.5.2 MCU.C.6.2 MCU.C.7.2 MCU.C.8.2 MCU.C.9.2 MCU.J.1.2 MCU.R.1.2 MCU.R.5.2 MCU.U.1.2 MCU.U.1.7 MCU.U.1.14 MCU.U.1.24 MCU.U.1.34 MCU.U.1.44 MOS.C.10.2 MOS.C.11.2 MOS.D.1.A MOS.R.3.2 MOS.U.2.5 USB.FB.1.2 | length 113.3
  Top Layer w0.35: MCU.C.6.2 ccw(c13.809,47.362) 13.809,46.5 MCU.U.1.14 ; MCU.C.5.2 17.324,37.329 ccw(c18.6,38.605) v1(18.6,36.8) ccw(c17.393,38.007) 18.988,37.4 ccw(c17.393,38.007) 19.1,38.007 MCU.U.1.24 ; MCU.U.1.7 v1(21.5,51.2) ; MCU.U.1.2 v1(25.5,51.4) ; MCU.U.1.34 29.502,40.1 ccw(c29.502,40.945) MCU.C.9.2 ; MCU.U.1.44 29.592,49.642 cw(c30.1,49.134) MCU.C.8.2
  Top Layer w1: MCU.C.7.2 MCU.C.6.2 cw(c14.654,48.207) 12.598,48.207 MCU.R.1.2 ; MCU.R.5.2 30.302,39.859 ccw(c29.611,39.859) MCU.C.9.2 ccw(c30.215,40.463) 30.215,40.3 v1(31.8,40.3)
  Top Layer w1.1: USB.FB.1.2 15.144,8.554 cw(c16.94,10.35) 14.4,10.35 14.4,12.5 cw(c16.94,12.5) 15.144,14.296 17.5,16.652 MOS.C.10.2 ; 17.914,15.425 ccw(c20.249,17.039) 20.24,14.2 cw(c20.246,13.1) 20.246,14.2 21.807,14.2 ccw(c21.81,18.763) 25.039,15.539 26.972,17.472 cw(c35.728,8.719) 35.729,21.1 35.732,21.1 37.046,21.1 ccw(c37.046,23.64) 38.842,21.844 MOS.R.3.2 ; 17.913,15.425 cw(c19.633,16.604) 17.548,16.605 MOS.C.10.2 ; MOS.U.2.5 18.292,20.992 ccw(c20.088,19.195) 17.548,19.195 MOS.C.11.2 MOS.C.10.2
  Bottom Layer w1.1: 13.5,38 11.563,36.063 ccw(c17.743,29.879) 9,29.879 9,29.875 9,24.052 ccw(c11.54,24.052) 9.744,22.256 10.056,21.944 ccw(c11.852,23.74) 11.852,21.2 MOS.U.2.5 ; 31.6,41.5 35.648,41.5 cw(c35.648,38.96) 37.444,40.756 38.656,39.544 cw(c36.86,37.748) 39.4,37.748 39.4,32.507 cw(c37.693,32.507) 38.9,31.3 38.844,31.244 ccw(c40.64,29.448) 38.1,29.448 v3(38.1,24.1)
  other v1: 14.8,46.5 28.6,49.1
pads on no net: MCH.FID.1.1 MCH.FID.2.1 MOS.U.2. USB.J.2.4

## Polygon pours and split planes (outlines as drawn)
GND on Top Layer "GND_L01_P004" (solid, remove dead copper, pour order 4): -1,56 -1,0 44,0 44,56
V_USB on Top Layer "V_USB_L01_P002" (solid, remove dead copper, pour order 2): 37.5,26.6 37.5,19.624 ccw(c38.524,19.624) 37.8,18.9 ccw(c38.041,19.141) 38.041,18.8 39.617,18.8 ccw(c39.617,19.483) 40.1,19 ccw(c39.617,19.483) 40.3,19.483 40.3,25.159 ccw(c39.959,25.159) 40.2,25.4
NetMOS.D.1_C on Top Layer "NETMOS.D.1_C_L01_P001" (solid, remove dead copper, pour order 1): 40.2,34.493 ccw(c38.493,34.493) 39.7,35.7 ccw(c38.734,34.734) 38.734,36.1 37.807,36.1 ccw(c37.807,34.393) 36.6,35.6 ccw(c37.566,34.634) 36.2,34.634 36.2,33.7 ccw(c36.683,33.7) 36.341,33.359 36.9,32.8 cw(c35.451,31.351) 37.5,31.351 37.5,30.1 39.959,30.1 ccw(c39.959,30.441) 40.2,30.2
GND on Bottom Layer "GND_L04_P007" (solid, remove dead copper, pour order 7): 0,55 43,55 43,0 0,0
V_USB on Bottom Layer "V_USB_L04_P003" (solid, remove dead copper, pour order 3): 15,53 26.948,53 cw(c26.948,50.46) 28.744,52.256 32.256,48.744 cw(c30.46,46.948) 33,46.948 33,40.052 cw(c30.46,40.052) 32.256,38.256 30.744,36.744 cw(c28.948,38.54) 28.948,36 15.052,36 cw(c15.052,38.54) 13.256,36.744 12.744,37.256 cw(c14.54,39.052) 12,39.052 12,49.948 cw(c14.54,49.948) 12.744,51.744 13.293,52.293 cw(c15,50.586)
GND on Plane 1 "GND_L02_P005" (solid, remove dead copper, pour order 5): 0,55 43,55 43,0 0,0
GND on Plane 2 "GND_L03_P006" (solid, remove dead copper, pour order 6): 0,55 43,55 43,0 0,0

## Silkscreen, mask and mechanical layers (free items; w line width, h text height)
Top Overlay:
  text "BOOTLOADER" at 33.4,40.023 h1.52
Bottom Overlay:
  text "MiniBall R1.001 January 2021 / Ploopy Corporation / Licensed under CERN OHL v.1.2" at 8,37.6 h2.5 r90
  text "Concealed within his fortress,  / the lord of Mordor sees all.  /  / His gaze pierces cloud,  / shadow, earth, and flesh." at 27.5,2.075 h1.5
Board Outline:
  the board outline again, w0.2

## Text inside footprints (layer, text, board x,y; h text height)
MOS.U.2: Top Overlay "Sensor Side" at 10.9,23.1 h2 r90; Top Overlay "1" at 28.4,32.8 h4; Bottom Overlay "Optic Side" at 10.4,31.4 h2 r90